# Altium PCB Main.PcbDoc (part 2 of 2)
Units mm, origin at the board's own origin, x right, y up, seen from the top; angles counter-clockwise.
Board outline 184.78 x 184.78 mm, 2 copper layers (Top Layer, Bottom Layer); 86 components, 58 nets, 400 pads, 352 vias.
Unrouted connection lines stored in the file: 51.
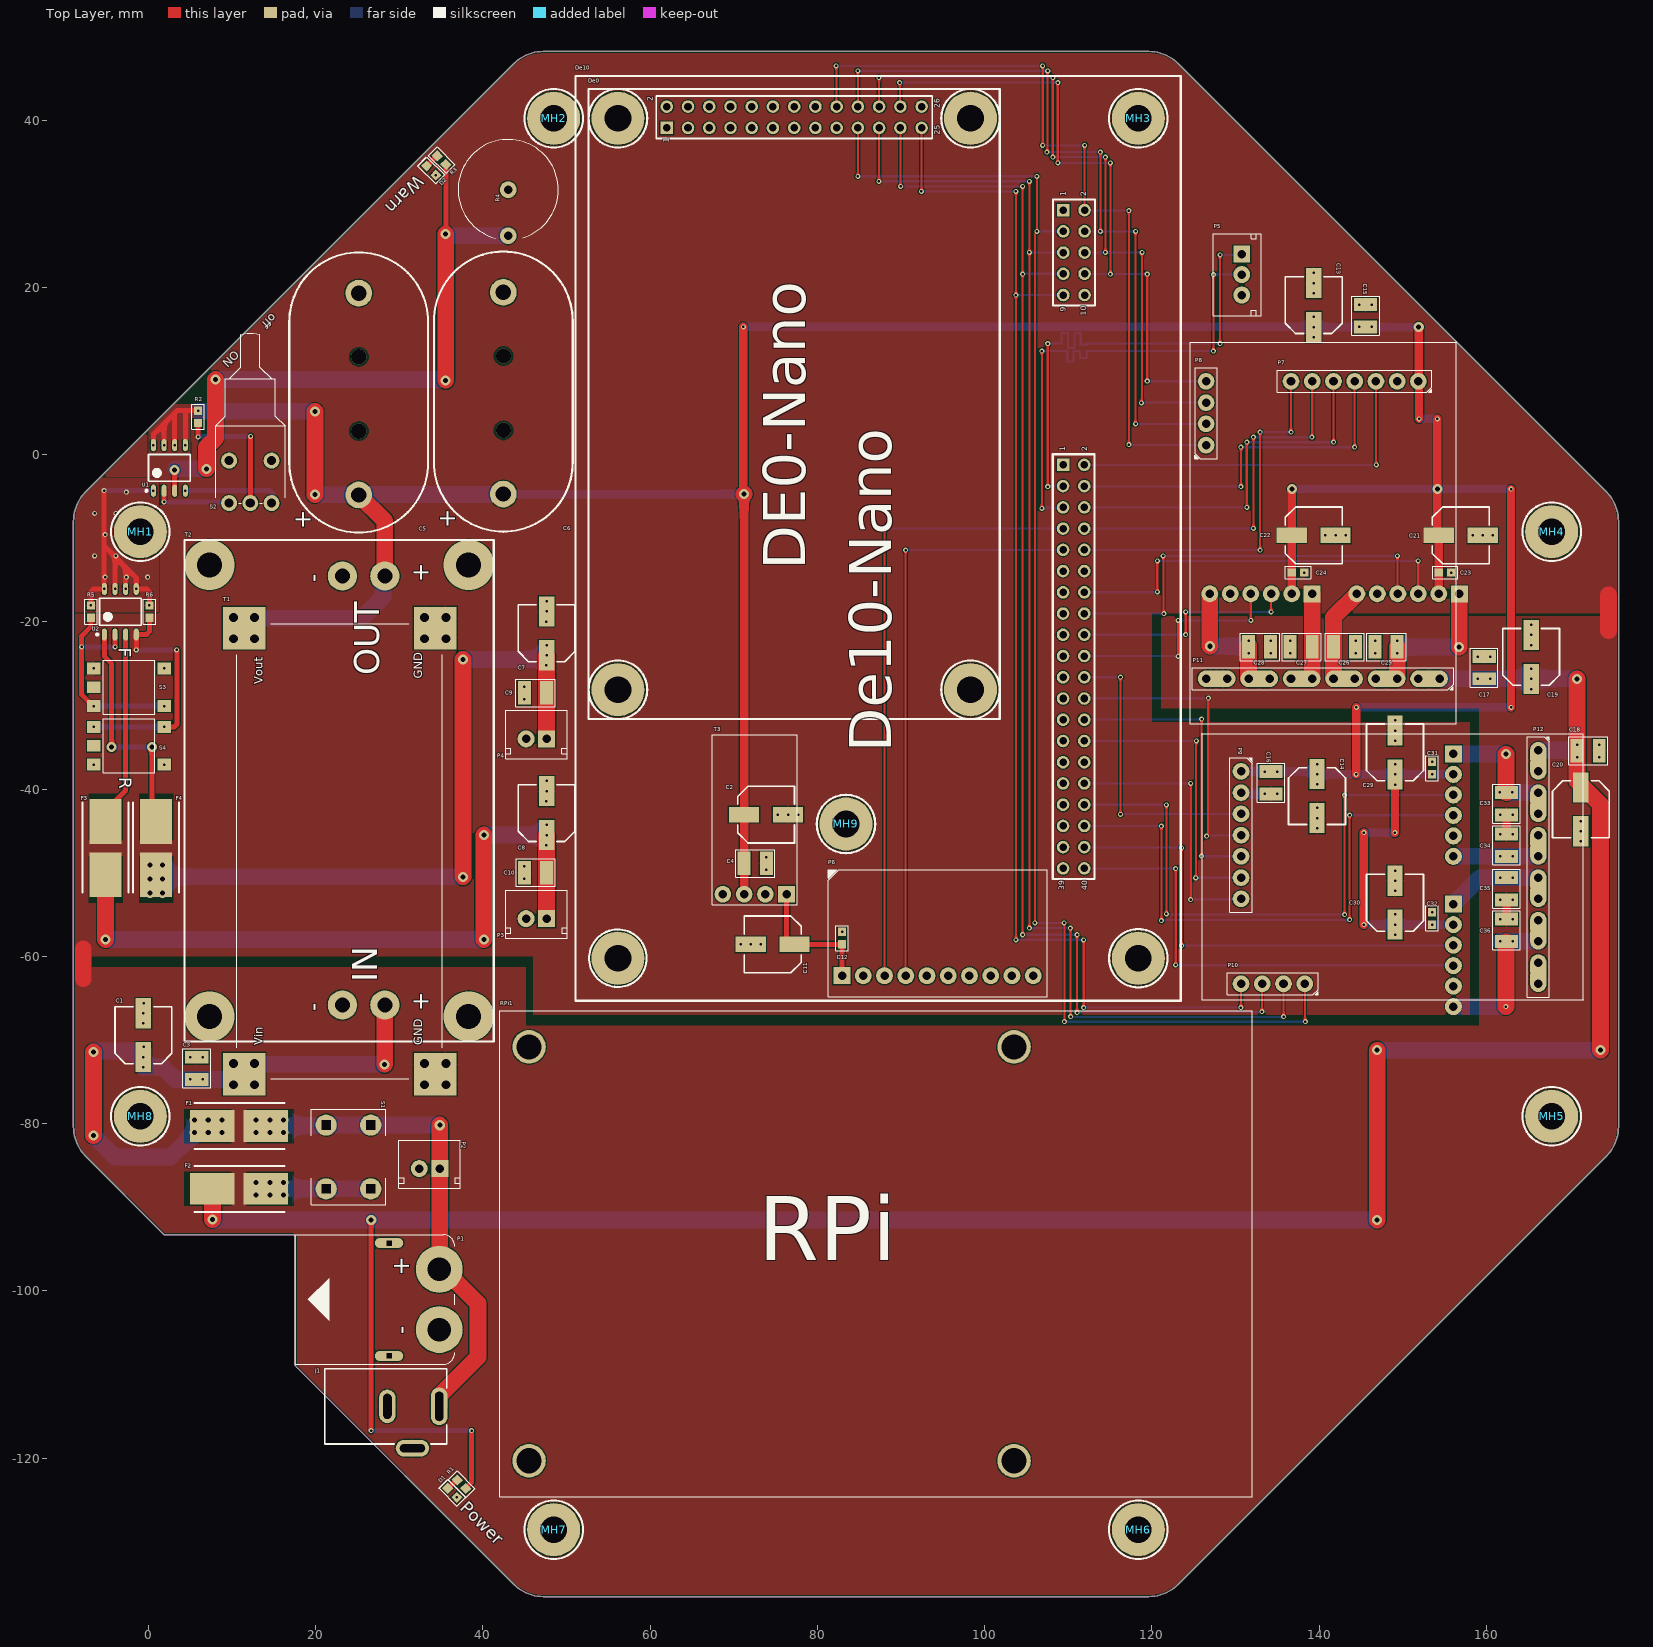
[diagram p0: Top Layer view]

## Keep-outs (continued)
Keep-Out Layer: (continued)
  lines w0.013: -7.514,-83.914 cw(c-3.979,-80.378) -8.979,-80.378 -8.979,-7.983 cw(c-3.979,-7.983) -7.514,-4.448 43.676,46.743 cw(c47.212,43.207) 47.212,48.207 119.607,48.207 cw(c119.607,43.207) 123.142,46.743 174.333,-4.448 cw(c170.797,-7.983) 175.797,-7.983 175.797,-80.378 cw(c170.797,-80.378) 174.333,-83.914 123.142,-135.104 cw(c119.607,-131.569) 119.607,-136.569 47.212,-136.569 cw(c47.212,-131.569) 43.676,-135.104 17.567,-108.995 17.567,-93.614 ccw(c17.242,-93.614) 17.242,-93.289 1.867,-93.289 -7.514,-83.914 ; -7.514,-83.914 -7.514,-83.914

## Silkscreen, mask and mechanical layers (free items; w line width, h text height)
Top Overlay:
  lines w0.1: 124.495,-32.19 156.375,-32.19 156.375,13.495 ; 124.545,-32.24 124.545,13.445 156.425,13.445 ; 125.902,-33.383 171.587,-33.383 171.587,-65.263 ; 125.952,-33.333 125.952,-65.213 171.637,-65.213
  text "Warn" at 32.015,33.501 h1.5 r225
  text "off" at 14.735,16.951 h1 r225
  text "ON" at 10.235,12.551 h1 r225
  text "F" at -3.535,-23.125 h1.5 r270
  text "R" at -3.5,-38.6 h1.5 r270
  text "Power" at 37.189,-126.075 h1.5 r315

## Text inside footprints (layer, text, board x,y; h text height)
C5: Top Overlay "+" at 19.38,-8.907 h2 r90
C6: Top Overlay "+" at 36.68,-8.807 h2 r90
De0: Top Overlay "1" at 62.226,37.264 h0.64 r90; Top Overlay "26" at 94.626,41.434 h0.64 r90; Top Overlay "25" at 94.626,38.234 h0.64 r90; Top Overlay "2" at 60.326,42.234 h0.64 r90
De10: Top Overlay "40" at 112.234,-52.093 h0.64 r90; Top Overlay "39" at 109.534,-52.093 h0.64 r90; Top Overlay "2" at 112.164,30.877 h0.64 r90; Top Overlay "1" at 109.664,30.877 h0.64 r90; Top Overlay "9" at 109.664,17.077 h0.64 r90; Top Overlay "10" at 112.164,16.577 h0.64 r90; Top Overlay "2" at 112.234,0.407 h0.64 r90; Top Overlay "1" at 109.634,0.407 h0.64 r90
P1: Top Overlay "-" at 31.197,-105.184 h2 r90; Top Overlay "+" at 31.197,-98.199 h2 r90
RPi1: Top Overlay "RPi" at 72.935,-96.325 h7.62
T1: Top Overlay "Vout" at 13.665,-27.44 h1 r90; Top Overlay "GND" at 32.715,-26.805 h1 r90; Top Overlay "GND" at 32.715,-70.62 h1 r90; Top Overlay "Vin" at 13.665,-70.62 h1 r90
T2: Top Overlay "OUT" at 27.615,-26.375 h3 r90; Top Overlay "IN" at 27.365,-63.125 h3 r90; Top Overlay "-" at 20.685,-66.575 h2 r90; Top Overlay "+" at 33.518,-66.575 h2 r90; Top Overlay "-" at 20.685,-15.275 h2 r90; Top Overlay "+" at 33.518,-15.275 h2 r90